# EAGLE board JM Logics I2C SMD Adapter v1.4 (EAGLE 6.5.0)
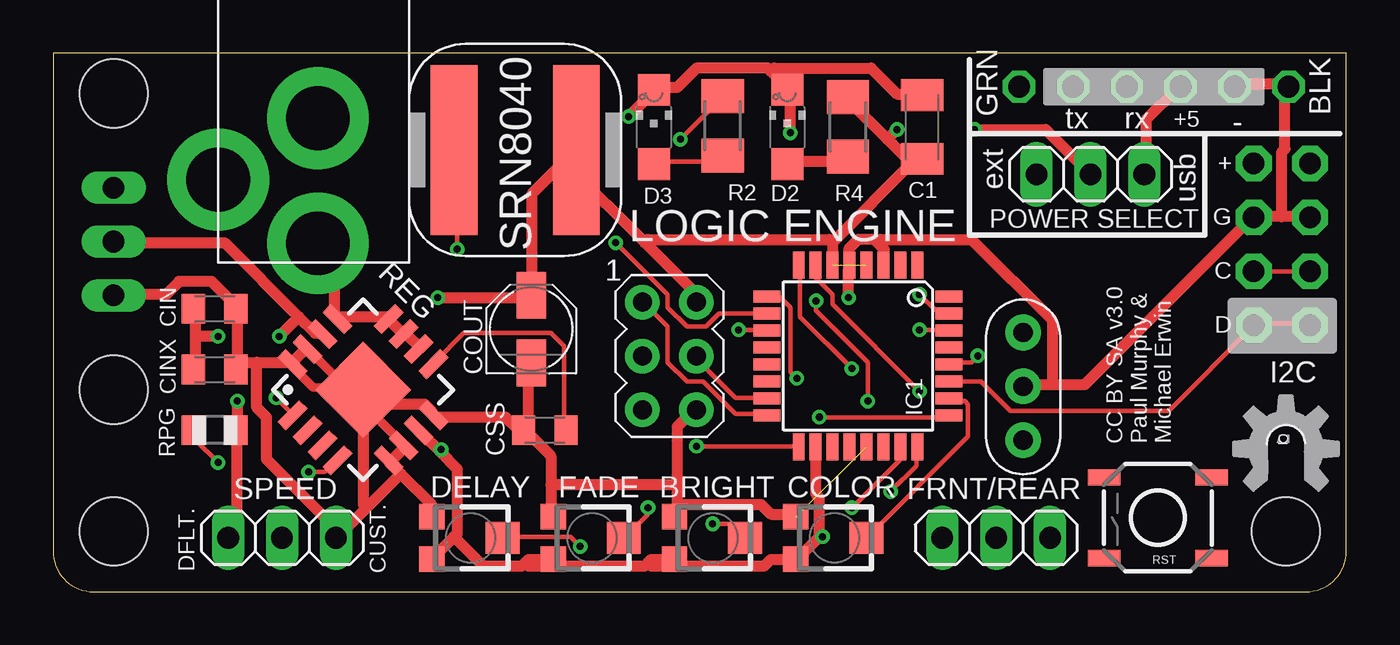
[diagram p0: board, top side]
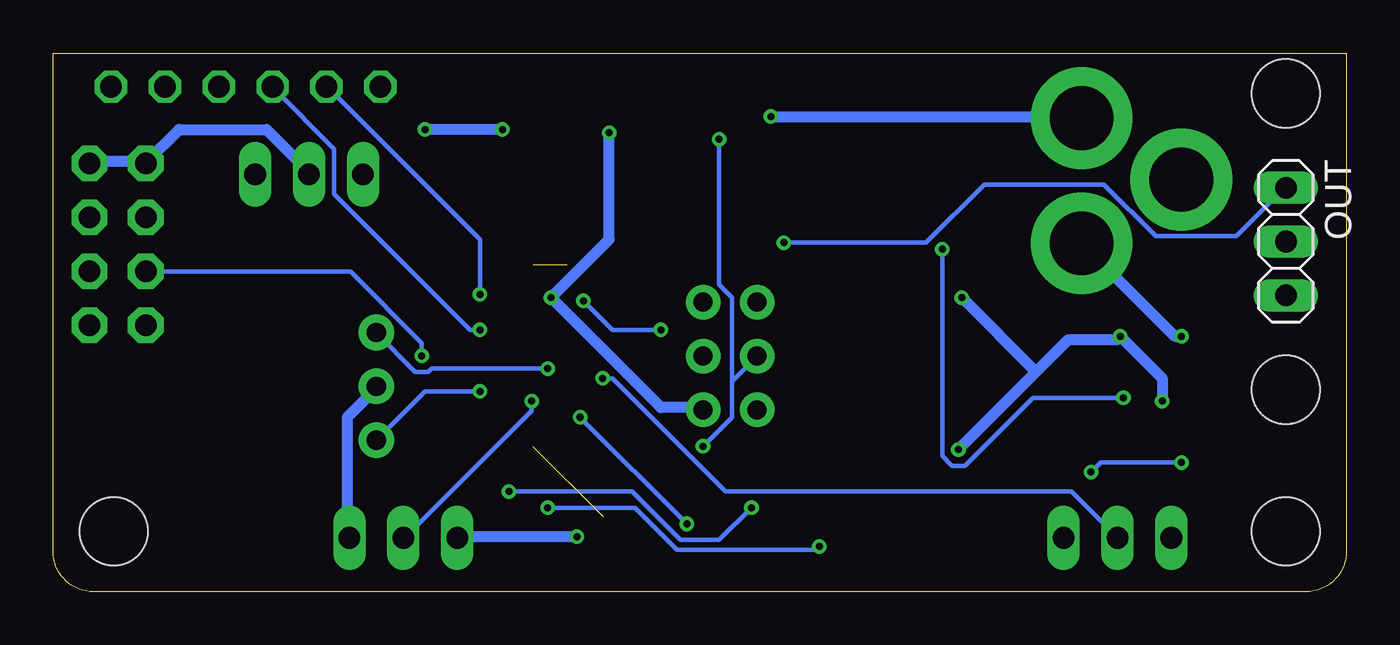
[diagram p1: board, bottom side, seen from below]

Size 60.96 x 25.4 mm. Coordinates in mm from the lower left corner, seen from the top.
Outline: 0,25.4 0,1.91 arc90 1.91,0 59.05,0 arc90 60.96,1.91 60.96,25.4 0,25.4
Copper layers (1*16): Top 0.0356mm / dielectric 1.5011mm / Bottom 0.0356mm
Design rules "LaenPCBOrder *": minimum track width 8mil, minimum drill 13mil, track to track 6mil, track to pad 6mil, pad to pad 6mil, via to via 12mil, smd to smd 6mil, copper to edge 15mil, drill to drill 6mil, minimum pad ring 7mil, minimum via ring 7mil, stop-mask expansion 4mil, vias tented up to drill 14mil, thermal gap 10mil
Net classes: 1 supply: width 0.508 mm, drill 0.152 mm, clearance 0.203 mm
Holes 3.2 mm at 58.1,2.86 2.86,2.86 2.86,30.16 2.86,9.53 2.86,23.5

## Footprints (pad centres in the part's own frame; a part is rotated, then mirrored left to right if it is on the bottom)
TC33X = smd 1.2 x 1.2: 1 -1,-1.825; 3 1,-1.825 | smd 1.5 x 1.6: 2 0,1.5
C1206K = smd 1.5 x 2: 1 -1.5,0; 2 1.5,0
C0805K = smd 1.1 x 1.4: 1 -1,0; 2 1,0
CASE_B = smd 2.2 x 1.4: + 1.6,0; - -1.6,0
CHIPLED_1206 = smd 1.5 x 1.5: A 0,-1.75; C 0,1.75
1X03 = drill 1.016 long: 1 -2.54,0; 2 0,0; 3 2.54,0
1X04-CB = drill 1.016 pad 1.676 octagon: 1 -3.81,0; 2 -1.27,0; 3 1.27,0; 4 3.81,0
TQFP32-08 = smd 1.27 x 0.559: 1 -4.293,2.8; 2 -4.293,2; 3 -4.293,1.2; 4 -4.293,0.4; 5 -4.293,-0.4; 6 -4.293,-1.2; 7 -4.293,-2; 8 -4.293,-2.8; 17 4.293,-2.8; 18 4.293,-2; 19 4.293,-1.2; 20 4.293,-0.4; 21 4.293,0.4; 22 4.293,1.2; 23 4.293,2; 24 4.293,2.8 | smd 0.559 x 1.27: 9 -2.8,-4.293; 10 -2,-4.293; 11 -1.2,-4.293; 12 -0.4,-4.293; 13 0.4,-4.293; 14 1.2,-4.293; 15 2,-4.293; 16 2.8,-4.293; 25 2.8,4.293; 26 2,4.293; 27 1.2,4.293; 28 0.4,4.293; 29 -0.4,4.293; 30 -1.2,4.293; 31 -2,4.293; 32 -2.8,4.293
AVRISP = drill 0.9 pad 1.626: 1 -1.27,2.54; 2 1.27,2.54; 3 -1.27,0; 4 1.27,0; 5 -1.27,-2.54; 6 1.27,-2.54
SRN8040 = smd 2.2 x 8: P$1 1.125,4; P$2 6.875,4
PJ-102A = drill 3 pad 4.8: RING 0.1,-3.39; RING_SW -4.6,-6.29; TIP 0.1,-9.29
1X06-CLEAN = drill 1.016 octagon: 1 -6.35,0; 2 -3.81,0; 3 -1.27,0; 4 1.27,0; 5 3.81,0; 6 6.35,0
M1206 = smd 1.6 x 2: 1 -1.4,0; 2 1.4,0
TPS6213X = smd 1.45 x 0.55: 1 -3.2,1.5; 2 -3.2,0.5; 3 -3.2,-0.5; 4 -3.2,-1.5; 9 3.2,-1.5; 10 3.2,-0.5; 11 3.2,0.5; 12 3.2,1.5 | smd 0.55 x 1.45: 5 -1.5,-3.2; 6 -0.5,-3.2; 7 0.5,-3.2; 8 1.5,-3.2; 13 1.5,3.2; 14 0.5,3.2; 15 -0.5,3.2; 16 -1.5,3.2 | smd 3.2 x 3.2: 17-THERMALPAD 0,0
R0805 = smd 1.1 x 1.4: 1 -1,0; 2 1,0
TACTILE_SWITCH_SMD = smd 1.524 x 0.762: 1 -2.54,1.905; 2 2.54,1.905; 3 -2.54,-1.905; 4 2.54,-1.905
CERM_OSC = drill 0.9 pad 1.676: P$1 -2.54,0; P$2 0,0; P$3 2.54,0

## Placement (x,y rotation side)
BRIGHT  [TC33X]  31.11,2.54 270 top
C1  0.1uF  [C1206K]  40.96,21.91 90 top
CIN  10uF  [C0805K]  7.62,13.34 0 top
CINX  100nF  [C0805K]  7.62,10.48 0 top
COLOR  [TC33X]  36.83,2.54 270 top
COUT  22uF  [CASE_B]  22.54,12.38 90 top
CSS  3.3nF  [C0805K]  23.18,7.62 180 top
D2  [CHIPLED_1206]  34.61,21.91 0 top
D3  Green  [CHIPLED_1206]  28.32,21.91 0 top
DELAY  [TC33X]  19.68,2.54 270 top
FADE  [TC33X]  25.4,2.54 270 top
FRNT/REAR  [1X03]  44.45,2.54 0 top
I2C  [1X04-CB]  56.59,16.38 90 top
I2C1  [1X04-CB]  59.25,16.38 90 top
IC1  MEGA328P  [TQFP32-08]  37.94,11.11 270 top
ICSP  AVRISP-6  [AVRISP]  29.05,11.11 0 top
INDUCTOR  SRN8040-2R2Y  [SRN8040]  17.78,16.83 0 top
J2  2.1MMJACK  [PJ-102A]  12.38,25.72 0 top
JP7  [1X06-CLEAN]  51.88,23.81 180 top
OUT  [1X03]  2.86,16.51 270 bottom
PWR_SEL1  [1X03]  48.9,19.68 0 top
R3  1.0 K  [M1206]  31.56,21.97 270 top
R4  1.0 K  [M1206]  37.47,21.91 270 top
REG  TPS62133  [TPS6213X]  14.61,9.53 45 top
RPG  100k  [R0805]  7.62,7.62 180 top
RST  [TACTILE_SWITCH_SMD]  52.07,3.49 180 top
SPEED  [1X03]  10.79,2.54 0 top
U$1  ROYAL-ENGINEERS-OF-NABOOSMALL  [ROYAL-ENGINEERS-OF-NABOO-SMALL]  73.5,15.24 0 bottom  (outside the outline)
U$2  RSERIES-OSHW-LOGOMEDIUM  [RSERIES-OSHW-LOGO-MEDIUM]  58.01,6.79 0 top
X1  16MHz  [CERM_OSC]  45.72,9.68 90 top

## Library data of the parts
BRIGHT CIN CINX COLOR CSS DELAY FADE ICSP RPG = adafruit
C1 D2 D3 J2 R3 R4 = minimidi
COUT = dp_devices
FRNT/REAR OUT PWR_SEL1 SPEED = pinhead
I2C I2C1 JP7 = carduino
IC1 = avr-7
INDUCTOR REG = joymonkey
RST = SparkFun-Electromechanical
U$1 U$2 = rseries
X1 = digg

## Nets
+5V [supply]: BRIGHT.3 C1.1 COLOR.3 COUT.+ DELAY.3 FADE.3 FRNT/REAR.1 I2C1.4 I2C.4 IC1.4 IC1.6 IC1.18 ICSP.2 INDUCTOR.P$2 OUT.2 PWR_SEL1.2 R4.1 REG.7 REG.14 RPG.1 SPEED.1
ANALOG0: DELAY.2 IC1.23
ANALOG1: FADE.2 IC1.24
ANALOG2: BRIGHT.2 IC1.25
ANALOG3: COLOR.2 IC1.26
ANALOG4: I2C1.1 I2C.1 IC1.27
ANALOG5: I2C1.2 I2C.2 IC1.28
AREF: IC1.20
DIGITAL2: IC1.32
DIGITAL3: IC1.1
DIGITAL4: IC1.2
DIGITAL5: IC1.9 SPEED.2
DIGITAL6: IC1.10 OUT.1
DIGITAL7: FRNT/REAR.2 IC1.11
DIGITAL8: IC1.12
DIGITAL9: IC1.13
DIGITAL10: IC1.14
GND [supply]: BRIGHT.1 C1.2 CIN.2 CINX.2 COLOR.1 COUT.- CSS.2 D2.C D3.C DELAY.1 FADE.1 FRNT/REAR.3 I2C1.3 I2C.3 IC1.3 IC1.5 IC1.21 ICSP.6 J2.RING JP7.1 JP7.2 OUT.3 REG.5 REG.6 REG.8 REG.15 REG.16 REG.17-THERMALPAD SPEED.3 X1.P$2
MISO: IC1.16 ICSP.1
MOSI: IC1.15 ICSP.4
N$1: IC1.7 X1.P$1
N$2: IC1.8 X1.P$3
N$3: INDUCTOR.P$1 REG.1
N$4: D3.A R3.2
N$5 [supply]: D2.A R4.2
N$6 [supply]: CIN.1 CINX.1 J2.TIP REG.10 REG.11 REG.12 REG.13
N$7: CSS.1 REG.9
N$8: REG.4 RPG.2
N$9 [supply]: PWR_SEL1.1
RST: ICSP.5
RTS#: JP7.6
RXD: IC1.30 JP7.4
SCK: IC1.17 ICSP.3 R3.1
TXD: IC1.31 JP7.5
USB_5V [supply]: JP7.3 PWR_SEL1.3

## Tracks (layer width: path | path; a pad name or v marks a point on that pad's centre or on a via)
+5V  (via drill 0.33)  (1 unrouted)
  Top 0.508: 36.73,16.46 36.73,15.54 IC1.6 | 36.73,16.46 40.54,20.27 40.84,20.27 C1.1 40.39,20.27 39.32,21.34 | 39.32,21.34 37.49,23.16 R4.1 | 27.89,16.46 24.23,20.12 INDUCTOR.P$2 24.54,20.73 22.55,18.75 22.55,14.02 COUT.+ 22.4,13.87 v18.14,13.87 | 27.89,16.46 30.18,14.17 30.18,13.72 ICSP.2 | 36.73,16.46 36.58,16.61 28.04,16.61 27.89,16.46 | PWR_SEL1.2 46.79,21.79 v43.43,21.79 | 39.32,21.34 v39.78,21.79 | SPEED.1 8.38,2.59 8.69,2.9 8.69,7.62 RPG.1 8.69,7.77 v8.69,8.99 | 11.58,12.95 8.08,16.46 2.9,16.46 OUT.2 | 11.58,12.95 12.34,12.19 12.65,12.19 REG.14 | 11.58,12.95 v10.67,12.04 | 18.9,2.59 19.05,2.74 19.05,5.79 18.21,6.63 | 18.9,2.59 17.98,1.68 DELAY.3 | 18.21,6.63 17.37,7.47 REG.7 | 22.25,1.37 22.1,1.22 20.27,1.22 18.9,2.59 | 22.25,1.37 22.4,1.52 23.47,1.52 FADE.3 | 28.04,1.37 27.89,1.22 22.4,1.22 22.25,1.37 | 28.04,1.37 28.19,1.52 29.26,1.52 BRIGHT.3 | 28.04,1.37 28.19,1.22 33.53,1.22 33.83,1.52 34.9,1.52 COLOR.3 35.2,1.68 36.12,2.59 | 36.12,2.59 36.12,4.42 35.97,4.57 35.97,6.71 IC1.18 | v36.27,2.59 36.12,2.59 | v18.29,6.71 18.21,6.63
  Bottom 0.508: PWR_SEL1.2 48.92,19.81 50.9,21.79 55.02,21.79 56.54,20.27 I2C.4 56.84,20.27 59.13,20.27 I2C1.4 | v39.78,21.79 v43.43,21.79 | v8.69,8.99 8.69,10.06 v10.67,12.04 10.82,11.89 13.11,11.89 14.63,10.36 | v36.27,2.59 41.91,2.59 FRNT/REAR.1 | v18.29,6.71 14.63,10.36 | 14.63,10.36 v18.14,13.87
ANALOG0  (via drill 0.33)
  Top 0.203: v37.64,3.96 39.93,6.25 39.93,6.71 IC1.23 | v24.84,2.13 24.38,2.59 21.34,2.59 DELAY.2
  Bottom 0.203: v37.64,3.96 33.53,3.96 31.55,1.98 24.99,1.98 v24.84,2.13
ANALOG1  (via drill 0.33)
  Top 0.203: v39.47,4.72 40.69,5.94 40.69,6.71 IC1.24 | v28.04,3.96 28.04,3.66 26.98,2.59 FADE.2
  Bottom 0.203: v39.47,4.72 33.68,4.72 31.39,2.44 29.57,2.44 v28.04,3.96
ANALOG2  (via drill 0.33)
  Top 0.203: v36.12,8.23 42.22,8.23 IC1.25 | v31.09,3.2 32,3.2 32.61,2.59 BRIGHT.2
  Bottom 0.203: v31.09,3.2 v36.12,8.23
ANALOG3
  Top 0.203: IC1.26 42.37,8.99 42.98,8.99 43.13,8.84 43.13,7.32 38.41,2.59 COLOR.2
ANALOG4
  Top 0.203: IC1.27 42.37,9.91 43.74,9.91 45.11,8.53 52.58,8.53 56.54,12.5 I2C.1 56.69,12.65 59.13,12.65 I2C1.1
ANALOG5  (via drill 0.33)
  Top 0.203: v43.59,11.12 43.28,10.82 42.37,10.82 IC1.28 | I2C1.2 59.13,15.09 56.69,15.09 I2C.2
  Bottom 0.203: v43.59,11.12 43.59,11.73 46.94,15.09 56.54,15.09 I2C.2
DIGITAL5  (via drill 0.33)
  Top 0.203: v35.05,10.06 34.75,10.36 34.75,13.41 34.29,13.87 33.68,13.87 IC1.9
  Bottom 0.203: v35.05,10.06 34.59,10.06 29.26,4.72 12.95,4.72 10.82,2.59 SPEED.2
DIGITAL6  (via drill 0.33)
  Top 0.203: v26.52,16.46 28.96,14.02 28.96,13.41 29.87,12.5 30.79,12.5 31.39,13.11 33.53,13.11 IC1.10
  Bottom 0.203: v26.52,16.46 19.81,16.46 17.07,19.2 11.43,19.2 8.99,16.76 5.18,16.76 2.9,19.05 OUT.1
DIGITAL7  (via drill 0.33)
  Top 0.203: v32.31,12.34 33.53,12.34 IC1.11 | v35.97,13.72 35.97,13.26 38.41,10.82 v38.41,8.99
  Bottom 0.203: v32.31,12.34 34.59,12.34 v35.97,13.72 | v38.41,8.99 38.41,8.53 44.35,2.59 FRNT/REAR.2
GND  (via drill 0.33)  (1 unrouted)
  Top 0.508: JP7.2 55.78,23.93 58.22,23.93 JP7.1 58.06,23.62 58.06,20.88 57.91,20.73 57.91,17.68 | 57.91,17.68 59.13,17.68 I2C1.3 | 57.91,17.68 56.69,17.68 I2C.3 56.39,17.53 48.62,9.75 47.09,9.75 | 47.09,9.75 45.72,9.75 X1.P$2 | 9.6,10.82 8.84,10.82 CINX.2 8.69,10.52 8.69,13.26 CIN.2 8.53,13.56 7.47,14.63 5.94,14.63 5.33,14.02 2.9,14.02 OUT.3 | 9.6,10.82 11.28,10.82 | 11.28,10.82 REG.16 | 11.28,10.82 11.89,11.43 REG.15 | 16.38,5.56 15.85,6.1 REG.5 16,6.25 16.61,6.86 REG.6 | 16.38,5.56 17.83,4.12 17.83,3.66 DELAY.1 | 16.38,5.56 14.78,3.96 | 14.78,3.96 13.41,2.59 SPEED.3 13.41,2.9 10.06,6.25 10.06,8.23 9.6,8.69 9.6,10.82 | 14.78,3.96 14.63,4.12 14.63,9.45 REG.17-THERMALPAD 14.78,8.84 17.53,8.84 17.83,8.53 REG.8 17.98,8.23 21.34,8.23 21.95,7.62 CSS.2 | 33.83,24.54 34.59,23.77 D2.C 34.75,23.47 v34.75,21.64 | 33.83,24.54 33.68,24.69 30.33,24.69 29.41,23.77 28.35,23.77 D3.C 28.19,23.47 v27.13,22.4 | C1.2 40.84,23.47 39.78,23.47 38.56,24.69 33.98,24.69 33.83,24.54 | 23.47,5.03 23.47,6.4 22.25,7.62 CSS.2 | 23.47,5.03 23.47,3.66 FADE.1 | COUT.- 22.4,10.67 22.4,7.77 CSS.2 | 37.49,15.39 IC1.5 | 38.86,16.46 39.17,16.15 39.17,15.54 IC1.3 39.17,15.39 | 38.86,16.46 38.71,16.61 37.95,16.61 37.49,16.15 37.49,15.54 IC1.5 | 29.41,5.03 29.41,7.77 30.18,8.53 ICSP.6 30.33,8.53 | 29.41,5.03 29.41,3.66 BRIGHT.1 29.57,4.12 33.38,4.12 33.83,3.66 34.9,3.66 COLOR.1 | v37.49,13.87 37.49,15.24 IC1.5 | 29.41,5.03 23.47,5.03 | 47.09,9.75 47.09,12.8 43.28,16.61 39.01,16.61 38.86,16.46
  Bottom 0.508: FRNT/REAR.3 47.09,2.59 47.09,8.23 45.72,9.6 X1.P$2 | ICSP.6 30.33,8.69 32.31,8.69 v37.49,13.87 34.75,16.61 v34.75,21.64 | v27.13,22.4 12.5,22.4 J2.RING
MISO
  Top 0.203: IC1.16 33.53,8.38 32.16,8.38 30.63,9.91 29.87,9.91 28.96,10.82 28.96,12.5 27.89,13.56 ICSP.1
MOSI
  Top 0.203: IC1.15 33.53,9.14 32.16,9.14 30.33,10.97 ICSP.4
N$1  (via drill 0.33)
  Top 0.203: v40.84,9.45 36.73,13.56 36.73,14.02 35.97,14.78 35.97,15.39 IC1.7
  Bottom 0.203: v40.84,9.45 43.43,9.45 45.72,7.16 X1.P$1
N$2  (via drill 0.33)
  Top 0.203: v37.64,10.52 35.2,12.95 35.2,15.39 IC1.8
  Bottom 0.203: v37.64,10.52 43.13,10.52 43.28,10.36 43.89,10.36 45.72,12.19 X1.P$3
N$3  (via drill 0.33)
  Top 0.203: v10.52,9.14 11.28,8.38 REG.1 | v19.05,16.15 19.05,20.73 INDUCTOR.P$1
  Bottom 0.203: v10.52,9.14 14.78,9.14 17.98,5.94 18.59,5.94 19.05,6.4 v19.05,16.15
N$4
  Top 0.203: D3.A 28.35,20.27 31.39,20.27 31.55,20.42 R3.2
N$5
  Top 0.508: D2.A 34.75,20.27 37.19,20.27 37.34,20.42 R4.2
N$6  (via drill 0.33)
  Top 0.508: REG.10 17.22,11.58 16.76,12.04 REG.11 16.46,12.19 15.85,12.8 REG.12 15.7,12.95 13.41,12.95 REG.13 13.26,13.11 13.26,15.54 12.5,16.31 J2.TIP | 6.71,12.04 6.71,13.26 CIN.1 | 6.71,12.04 6.71,10.52 CINX.1 | v7.77,12.04 6.71,12.04
  Bottom 0.508: v7.77,12.04 8.08,12.04 12.34,16.31 J2.TIP
N$7
  Top 0.203: CSS.1 24.08,7.62 24.08,11.58 23.47,12.19 19.36,12.19 17.98,10.82 REG.9
N$8  (via drill 0.33)
  Top 0.203: v7.77,6.1 6.71,7.16 6.71,7.62 RPG.2 | v12.04,5.64 12.8,5.64 13.26,6.1 REG.4
  Bottom 0.203: v7.77,6.1 11.58,6.1 v12.04,5.64
RXD  (via drill 0.33)
  Top 0.203: v40.84,12.34 42.22,12.34 IC1.30
  Bottom 0.203: v40.84,12.34 41.3,12.34 47.7,18.75 47.7,20.88 50.6,23.77 JP7.4
SCK  (via drill 0.33)
  Top 0.203: v30.33,6.86 35.05,6.86 IC1.17 | v29.57,21.34 31.55,23.32 R3.1
  Bottom 0.203: v30.33,6.86 28.96,8.23 28.96,9.91 | 28.96,9.91 27.89,10.97 ICSP.3 | v29.57,21.34 29.57,14.48 28.96,13.87 28.96,9.91
TXD  (via drill 0.33)
  Top 0.203: v40.84,14.02 41.6,13.26 42.22,13.26 IC1.31
  Bottom 0.203: v40.84,14.02 40.84,16.61 48.01,23.77 JP7.5
USB_5V
  Top 0.508: PWR_SEL1.3 51.51,19.81 51.51,22.25 53.03,23.77 JP7.3

## Text on the board
Bottom: v1.4
tPlace: tx | rx | +5 | - | GRN | BLK | ext | D3 | R2 | usb | LOGIC ENGINE | POWER SELECT | CUST. | DFLT.
_tsilk: + | G | C | D | CC BY SA v3.0 / Paul Murphy & / Michael Erwin